# Altium PCB EC-Remoter.PcbDoc
Units mil, origin at the board's own origin, x right, y up, seen from the top; angles counter-clockwise.
Board outline 1574.8 x 1181.1 mil, 2 copper layers (Top Layer, Bottom Layer); 57 components, 44 nets, 248 pads, 38 vias.
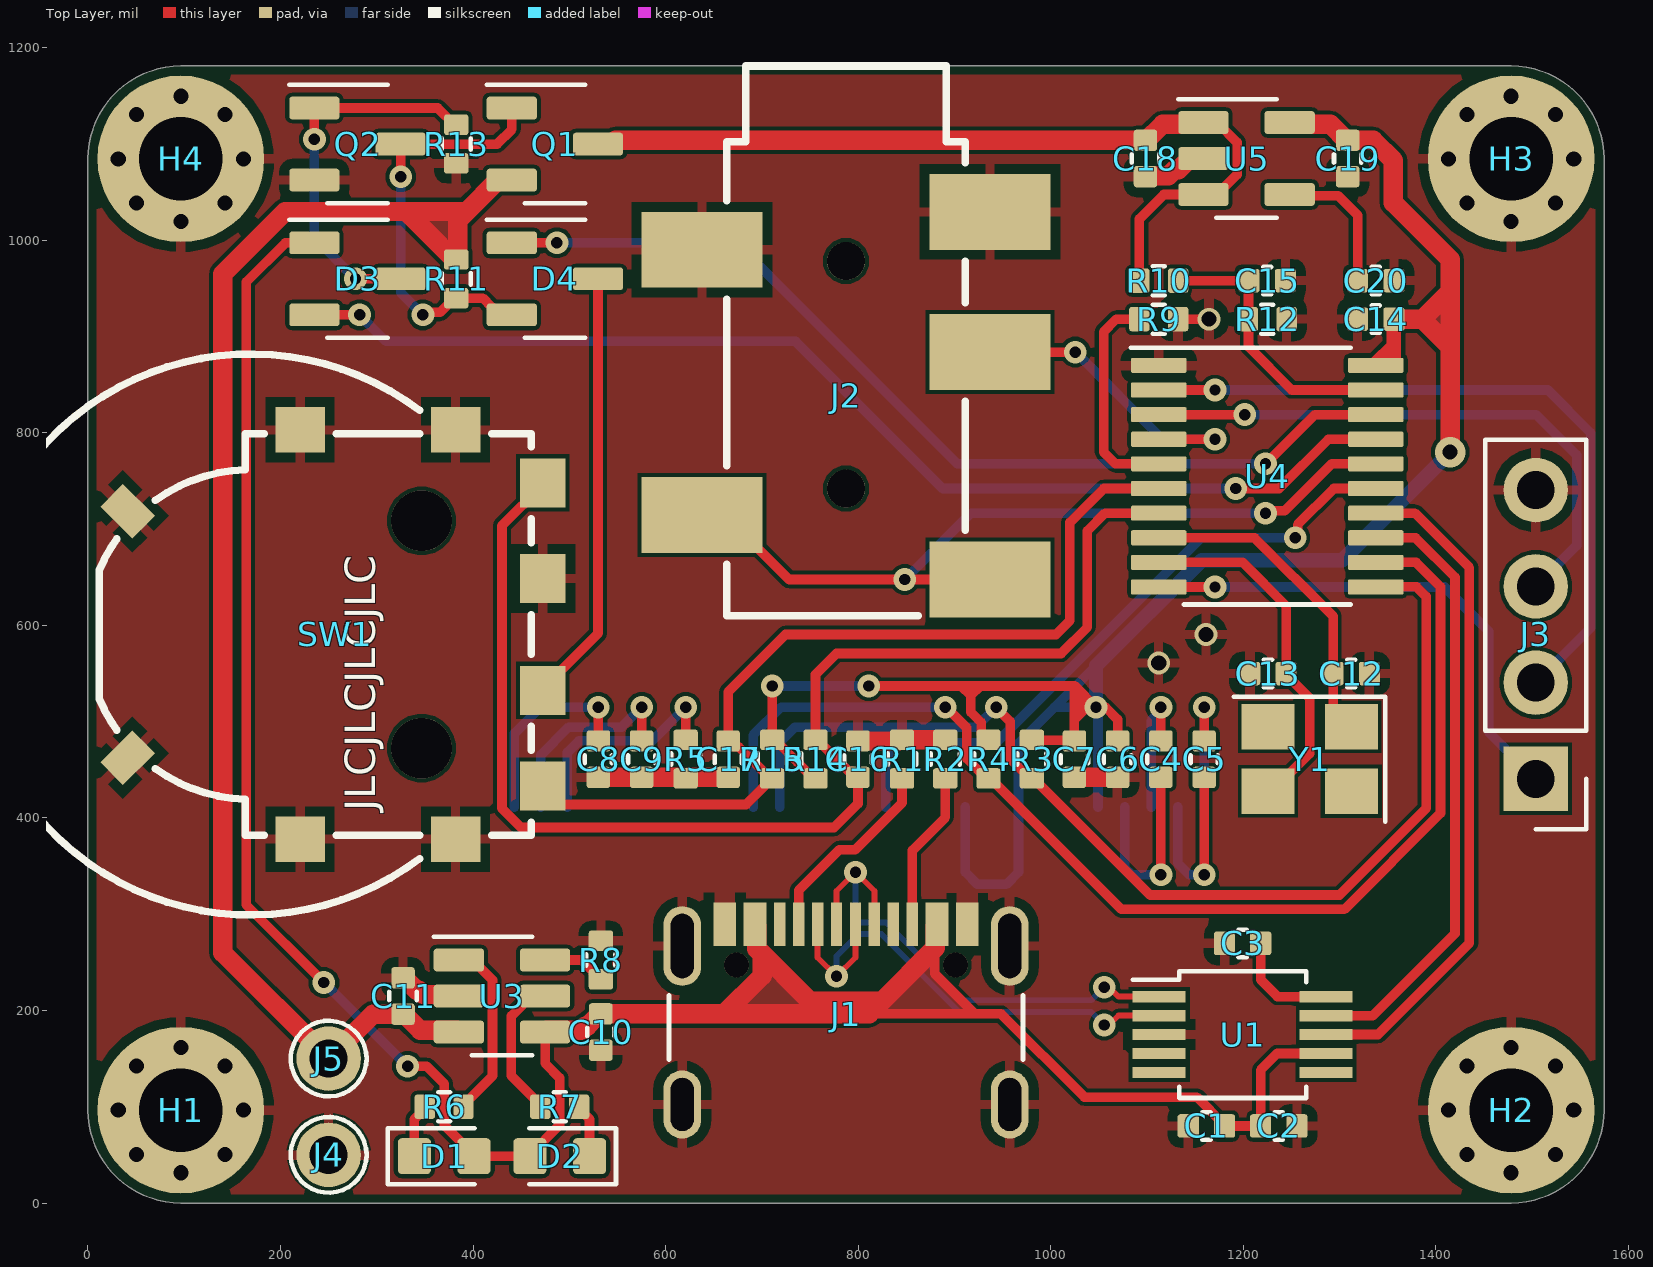
[diagram p0: Top Layer view]
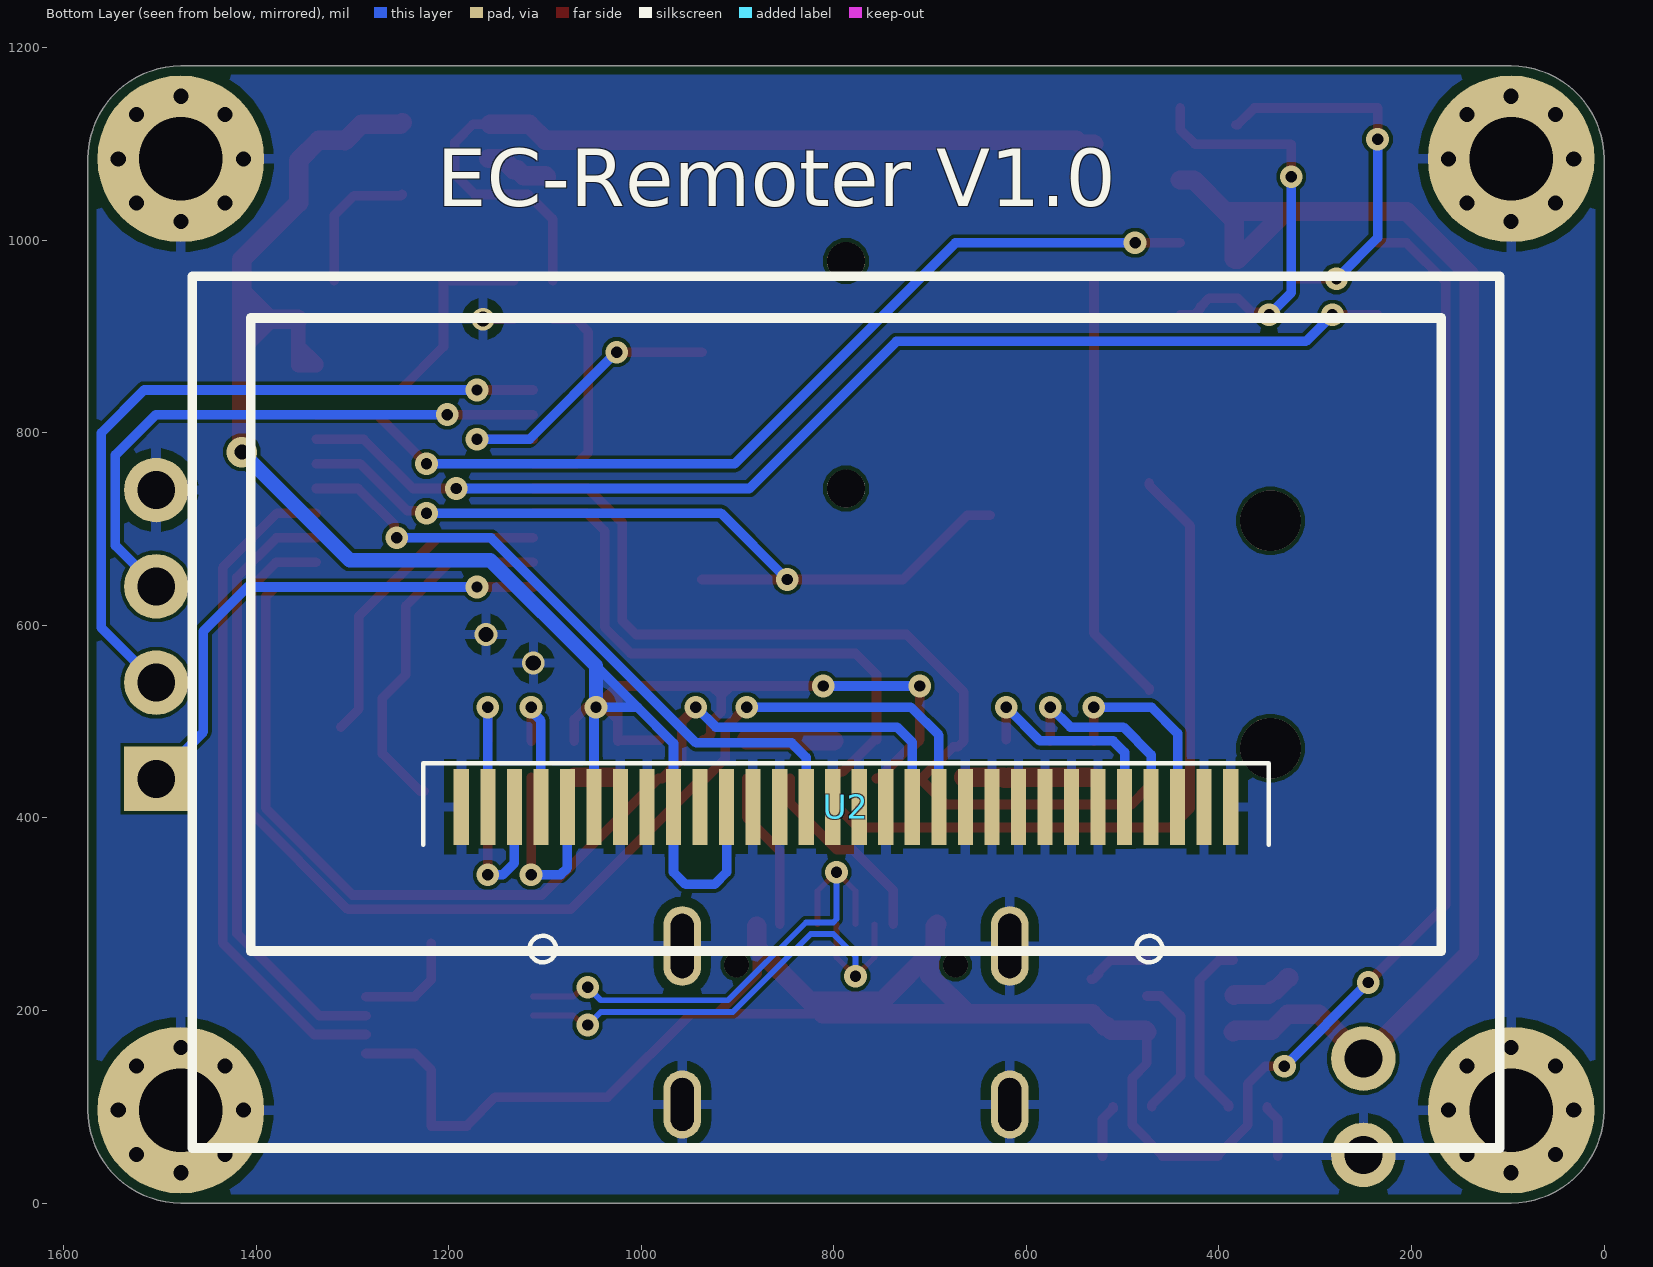
[diagram p1: Bottom Layer view, seen from below]
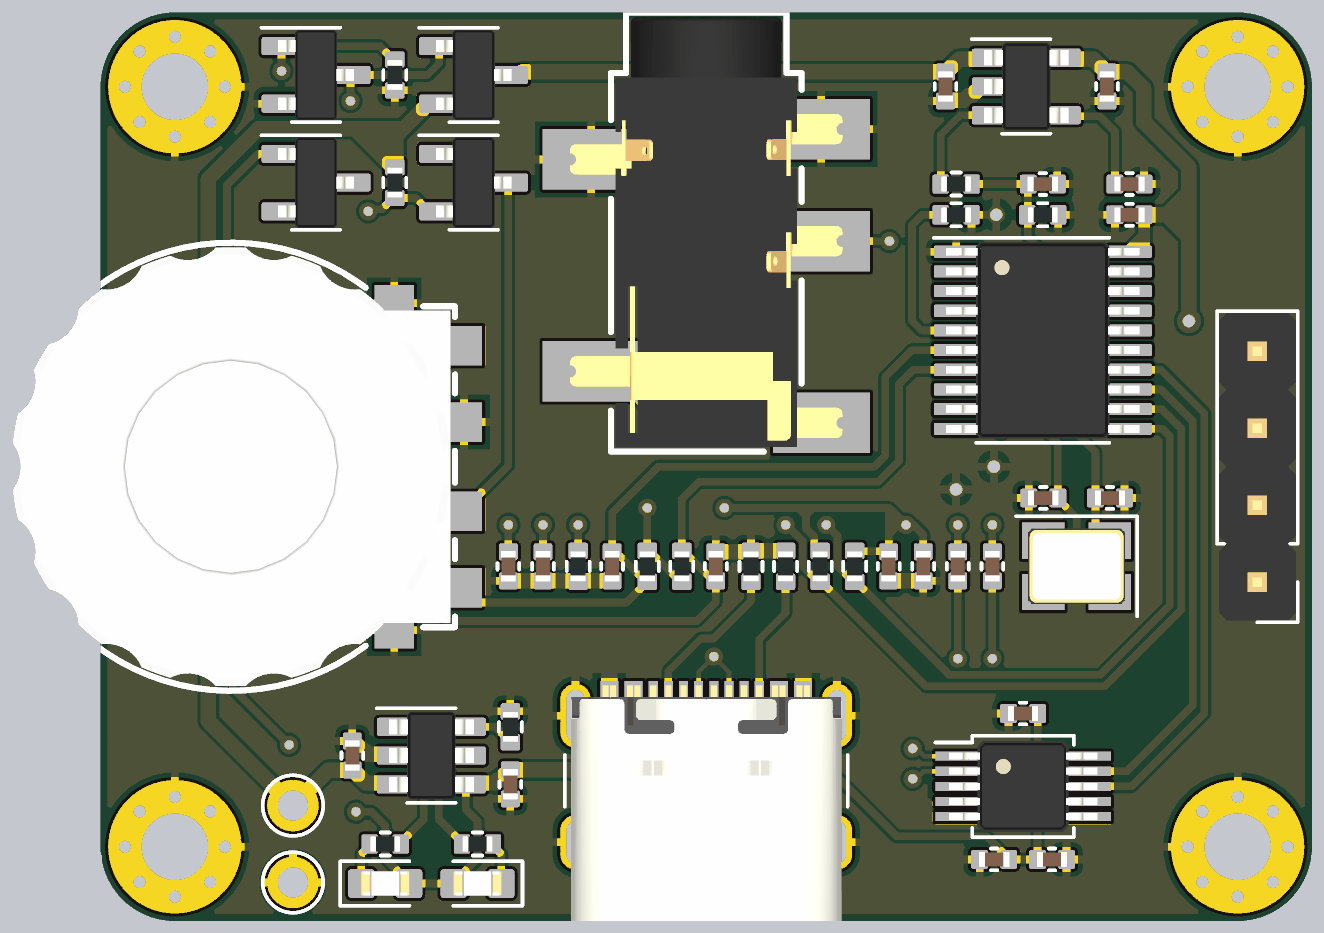
[diagram p2: 3D render of the assembled board from above, using the file's embedded part models]

## Layer stack, top to bottom
Top Solder: solder mask 0.4, Solder Resist, Dk 3.5
Top Layer: signal copper 1.4
Dielectric 1: dielectric 12.6, FR-4, Dk 4.8
Bottom Layer: signal copper 1.4
Bottom Solder: solder mask 0.4, Solder Resist, Dk 3.5

## Board outline
0,96.46 ccw(c96.46,96.46) 96.46,0 1478.35,0 ccw(c1478.35,96.46) 1574.8,96.46 1574.8,1084.65 ccw(c1478.35,1084.65) 1478.35,1181.1 96.46,1181.1 ccw(c96.46,1084.65) 0,1084.65

## Design rules (kind name [scope] priority, off if disabled: settings)
Clearance [All] p1: gap=3.94 ignorepadtopadclearanceinfootprint=FALSE
ComponentClearance [All] p1: gap=10 collisioncheckmode=3 verticalgap=10 showdistances=FALSE donotcheckwithout3dbody=TRUE
DiffPairsRouting [All] p1: maxlimit=10 minlimit=6 mostfreqgap=6 toplayer_minwidth=6 toplayer_maxwidth=15 toplayer_prefwidth=6 bottomlayer_minwidth=6 bottomlayer_maxwidth=15 bottomlayer_prefwidth=6 maxuncoupledlength=500
PolygonConnect [All] p1: connectstyle=Relief reliefconductorwidth=10 reliefentries=4 polygonreliefangle="90 Angle" airgapwidth=10
RoutingVias [All] p1: holewidth=28 width=50 viastyle="Through Hole" minholewidth=28 minwidth=50 maxholewidth=28 maxwidth=50
SilkToSilkClearance [All] p1: silktosilkclearance=5.91
SilkToSolderMaskClearance [IsPad] p1: minsilkscreentomaskgap=5.91 clearancetoexposedcopper=TRUE
SolderMaskExpansion [All] p1: expansion=4 istentingtop=FALSE
Width [All] p1: maxlimit=30 minlimit=4 preferedwidth=10 minimp=50.000000 maximp=50.000000 favimp=50.000000
26 further rules are at their usual default settings.

## Classes and differential pairs
differential pair USB: +USB_P -USB_N

## Components (designator, comment, footprint, x,y, rotation, side; value= is the part's Value field where it differs from the comment)
C1 "10uF" C_0402_1005Metric 1161.77,80 r180 top locked
C2 "100nF" C_0402_1005Metric 1236.97,80 r0 top locked
C3 "100nF" C_0402_1005Metric 1199.37,269.68 r180 top locked
C4 "1uF-10V" C_0402_1005Metric 1114.5,461.06 r90 top locked
C5 "1uF-10V" C_0402_1005Metric 1159.45,461.06 r90 top locked
C6 "1uF" C_0402_1005Metric 1069.55,461.06 r90 top locked
C7 "1uF" C_0402_1005Metric 1024.6,461.06 r90 top locked
C8 "2.2uF" C_0402_1005Metric 530.16,461.06 r90 top locked
C9 "2.2uF" C_0402_1005Metric 575.11,461.06 r90 top locked
C10 "10uF" C_0402_1005Metric 532.76,177.6 r270 top locked
C11 "10uF" C_0402_1005Metric 327.24,215 r90 top locked
C12 "12pF" C_0402_1005Metric 1312.28,550 r180 top locked
C13 "12pF" C_0402_1005Metric 1225.67,550 r0 top locked
C14 "0.1uF" C_0402_1005Metric 1337.72,918.11 r0 top locked
C15 "5pF" C_0402_1005Metric 1225,958.11 r0 top locked
C16 "0.1uF" C_0402_1005Metric 799.85,461.06 r90 top locked
C17 "0.1uF" C_0402_1005Metric 665.01,461.06 r270 top locked
C18 "1uF" C_0402_1005Metric 1098.5,1085 r270 top locked
C19 "1uF" C_0402_1005Metric 1308.5,1085 r270 top locked
C20 "22nF" C_0402_1005Metric 1337.72,958.11 r0 top locked
D1 "G" LED_0603_1608Metric 370,48.62 r0 top locked
D2 "R" LED_0603_1608Metric 490,48.62 r180 top locked
D3 "BAT54C" SOT-23-3 280,960 r0 top locked
D4 "BAT54C" SOT-23-3 485,960 r0 top locked
H1 "MountingHole_Pad" MountingHole_2.2mm_M2_Pad_Via 96.46,96.46 r0 top locked
H2 "MountingHole_Pad" MountingHole_2.2mm_M2_Pad_Via 1478.35,96.46 r0 top locked
H3 "MountingHole_Pad" MountingHole_2.2mm_M2_Pad_Via 1478.35,1084.65 r0 top locked
H4 "MountingHole_Pad" MountingHole_2.2mm_M2_Pad_Via 96.46,1084.65 r0 top locked
J1 "USB_C_Receptacle_USB2.0_16P" USB_C_Receptacle_GCT_USB4105-xx-A_16P_TopMnt_Horizontal 787.4,144.68 r0 top locked
J2 "PJ-327A" Jack_3.5mm_PJ327A_Horizontal 787.4,856.3 r0 top locked
J3 "Conn_01x04_Pin" PinHeader_1x04_P2.54mm_Vertical 1503.94,440.55 r180 top locked
J4 "Conn_01x01_Pin" TestPoint_Plated_Hole_D1.0mm 250,50 r0 top locked
J5 "Conn_01x01_Pin" TestPoint_Plated_Hole_D1.0mm 250,150 r0 top locked
Q1 "AO3401A" SOT-23-3 485,1100 r0 top locked
Q2 "AO3400A" SOT-23-3 280,1100 r0 top locked
R1 "5K1" R_0402_1005Metric 845.59,461.06 r270 top locked
R2 "5K1" R_0402_1005Metric 890.54,461.06 r270 top locked
R3 "4K7" R_0402_1005Metric 980.44,461.06 r270 top locked
R4 "4K7" R_0402_1005Metric 935.49,461.06 r270 top locked
R5 "560K-1%" R_0402_1005Metric 620.84,461.06 r90 top locked
R6 "1K" R_0402_1005Metric 370,100 r0 top locked
R7 "1K" R_0402_1005Metric 490,100 r180 top locked
R8 "2K-1%" R_0402_1005Metric 532.76,252.4 r90 top locked
R9 "10K" R_0402_1005Metric 1112.28,918.11 r180 top locked
R10 "1M" R_0402_1005Metric 1112.28,958.11 r0 top locked
R11 "100K" R_0402_1005Metric 382.5,960 r90 top locked
R12 "1M" R_0402_1005Metric 1225,918.11 r0 top locked
R13 "100K" R_0402_1005Metric 382.5,1100 r270 top locked
R14 "10K" R_0402_1005Metric 755.69,461.06 r270 top locked
R15 "10K" R_0402_1005Metric 710.74,461.06 r90 top locked
SW1 "SIQ-02FVS3" SIQ-02FVS3 169.29,590.55 r90 top locked
U1 "CH340X" MSOP-10_3x3mm_P0.5mm 1199.37,175 r0 top locked
U2 "OLED-128O064D-130I" OLED-128O064D 787.4,411.42 r180 bottom locked
U3 "TP4057" SOT-23-6 430,215 r0 top locked
U4 "Air001" TSSOP-20_4.4x6.5mm_P0.65mm 1225,755 r0 top locked
U5 "RT9193-33GB" SOT-23-5 1203.5,1085 r0 top locked
Y1 "24MHz" Crystal_SMD_3225-4Pin_3.2x2.5mm 1268.98,461.06 r180 top locked

## Footprints (in the part's own frame and the unit in brackets; to place one, negate y for a bottom-side part, rotate by r counter-clockwise, add the part's x,y. Pads: shape width x height; smd on the part's side, far side on the other; paste and mask are expansions set on the pad)
C_0402_1005Metric [mm]
  rrect25% 0.56x0.62 smd: 1(-0.48,0) 2(0.48,0)
  silkscreen extent -0.11,-0.36 0.11,0.36, body extent -0.5,-0.25 0.5,0.25, height 0.5
Crystal_SMD_3225-4Pin_3.2x2.5mm [mm]
  rect 1.4x1.2 smd: 1(-1.1,-0.85) 2(1.1,-0.85) 3(1.1,0.85) 4(-1.1,0.85)
  silkscreen extent -2,-1.65 2,1.65, body extent -1.6,-1.25 1.6,1.25, height 0.64
Jack_3.5mm_PJ327A_Horizontal [mm]
  rect 3.2x2 smd: 2(-3.8,-3.6) 3(-3.8,3.4) 4(3.8,4.4) 5(3.8,0.7) 6(3.8,-5.3)
  round 1 hole 1 unplated: ""(0,-2.9) ""(0,3.1)
  silkscreen extent -3.15,-6.25 3.15,8.25, body extent -4.5,-6.1 4.5,8.1, height 4.9
LED_0603_1608Metric [mm]
  rrect25% 0.875x0.95 smd: 1(-0.787,0) 2(0.787,0)
  silkscreen extent -1.49,-0.73 0.8,0.73, body extent -0.8,-0.4 0.8,0.4, height 1.1
MountingHole_2.2mm_M2_Pad_Via [mm]
  round 0.7 hole 0.4: 1(-1.65,0) 1(-1.167,-1.167) 1(-1.167,1.167) 1(0,-1.65) 1(0,1.65) 1(1.167,-1.167) 1(1.167,1.167) 1(1.65,0)
  round 4.4 hole 2.2: 1(0,0)
MSOP-10_3x3mm_P0.5mm [mm]
  rect 1.4x0.3 smd: 1(-2.2,1) 2(-2.2,0.5) 3(-2.2,0) 4(-2.2,-0.5) 5(-2.2,-1) 6(2.2,-1) 7(2.2,-0.5) 8(2.2,0) 9(2.2,0.5) 10(2.2,1)
  silkscreen extent -2.9,-1.68 1.68,1.68, body extent -2.45,-1.5 2.45,1.5, height 0.95
OLED-128O064D [mm]
  rect 0.4x2 smd: 1(-10.15,0) 2(-9.45,0) 3(-8.75,0) 4(-8.05,0) 5(-7.35,0) 6(-6.65,0) 7(-5.95,0) 8(-5.25,0) 9(-4.55,0) 10(-3.85,0) 11(-3.15,0) 12(-2.45,0) 13(-1.75,0) 14(-1.05,0) 15(-0.35,0) 16(0.35,0) 17(1.05,0) 18(1.75,0) 19(2.45,0) 20(3.15,0) 21(3.85,0) 22(4.55,0) 23(5.25,0) 24(5.95,0) 25(6.65,0) 26(7.35,0) 27(8.05,0) 28(8.75,0) 29(9.45,0) 30(10.15,0)
  silkscreen extent -11.15,-4.1 11.15,1.15
PinHeader_1x04_P2.54mm_Vertical [mm]
  rect 1.7x1.7 hole 1: 1(0,0)
  round 1.7 hole 1: 2(0,-2.54) 3(0,-5.08) 4(0,-7.62)
  silkscreen extent -1.33,-8.95 1.33,1.33, body extent -1.27,-8.89 1.27,1.27, height 8.54
R_0402_1005Metric [mm]
  rrect25% 0.54x0.64 smd: 1(-0.51,0) 2(0.51,0)
  silkscreen extent -0.15,-0.38 0.15,0.38, body extent -0.5,-0.25 0.5,0.25, height 0.35
SIQ-02FVS3 [mm]
  rect 1.3x1.2 smd: A(-4,-7.7) B(4,-7.7) C(1.475,-7.7) S(-1.475,-7.7)
  rect 1.2x1.3 smd: S1(-5.4,-5.4) S1(-5.4,-1.3) S1(5.4,-5.4) S1(5.4,-1.3)
  rect 0.85x1.2 smd rot 45: S1(-3.253,3.253)
  rect 0.85x1.2 smd rot 135: S1(3.253,3.253)
  round 1.6 hole 1.6 unplated: ""(-3,-4.5) ""(3,-4.5)
  silkscreen extent -7.4,-7.4 7.4,7.4, body extent -7.25,-7.26 7.25,7.21, height 4
SOT-23-3 [mm]
  rrect25% 1.325x0.6 smd: 1(-1.138,0.95) 2(-1.138,-0.95) 3(1.138,0)
  silkscreen extent -1.8,-1.56 0.8,1.56, body extent -1.25,-1.5 1.25,1.5, height 1.2
SOT-23-5 [mm]
  rrect25% 1.325x0.6 smd: 1(-1.138,0.95) 2(-1.138,0) 3(-1.138,-0.95) 4(1.138,-0.95) 5(1.138,0.95)
  silkscreen extent -1.8,-1.56 0.8,1.56, body extent -1.4,-1.45 1.4,1.45, height 1.55
SOT-23-6 [mm]
  rrect25% 1.325x0.6 smd: 1(-1.138,0.95) 2(-1.138,0) 3(-1.138,-0.95) 4(1.138,-0.95) 5(1.138,0) 6(1.138,0.95)
  silkscreen extent -1.8,-1.56 0.8,1.56, body extent -1.4,-1.45 1.4,1.45, height 1.55
TestPoint_Plated_Hole_D1.0mm [mm]
  round 1.7 hole 1: 1(0,0)
  silkscreen extent -1,-1 1,1
TSSOP-20_4.4x6.5mm_P0.65mm [mm]
  rrect25% 1.475x0.4 smd: 1(-2.863,2.925) 2(-2.863,2.275) 3(-2.863,1.625) 4(-2.863,0.975) 5(-2.863,0.325) 6(-2.863,-0.325) 7(-2.863,-0.975) 8(-2.863,-1.625) 9(-2.863,-2.275) 10(-2.863,-2.925) 11(2.863,-2.925) 12(2.863,-2.275) 13(2.863,-1.625) 14(2.863,-0.975) 15(2.863,-0.325) 16(2.863,0.325) 17(2.863,0.975) 18(2.863,1.625) 19(2.863,2.275) 20(2.863,2.925)
  silkscreen extent -3.6,-3.38 2.2,3.38, body extent -3.2,-3.25 3.2,3.25, height 1.2
USB_C_Receptacle_GCT_USB4105-xx-A_16P_TopMnt_Horizontal [mm]
  rect 0.3x1.15 smd: A1(-3.35,3.68) A4(-2.55,3.68) A5(-1.25,3.68) A6(-0.25,3.68) A7(0.25,3.68) A8(1.25,3.68) A9(2.55,3.68) A12(3.35,3.68) B1(3.05,3.68) B4(2.25,3.68) B5(1.75,3.68) B6(0.75,3.68) B7(-0.75,3.68) B8(-1.75,3.68) B9(-2.25,3.68) B12(-3.05,3.68)
  oval 1x1.8 hole 0.6 slot 1.4 at 90 deg: S1(-4.32,-1.075) S1(4.32,-1.075)
  oval 1x2.1 hole 0.6 slot 1.7 at 90 deg: S1(-4.32,3.105) S1(4.32,3.105)
  round 0.65 hole 0.65 unplated: ""(-2.89,2.605) ""(2.89,2.605)
  silkscreen extent -4.67,0.1 4.67,1.8, body extent -4.47,-3.67 4.47,4.11, height 3.31

## Part data
C1 C2 C3 C4 C5 C6 C7 C8 C9 C10 C11 C12 C13 C14 C15 C16 C17 C18 C19 C20: library part C, "Capacitor"
D1 D2: library part LED, "Light emitting diode"
D3 D4: "dual schottky barrier diode, common cathode"
H1 H2 H3 H4: "Mounting Hole with connection"
J1: "USB 2.0-only 16P Type-C Receptacle connector"
J3: "Generic connector, single row, 01x04"
J4 J5: "Generic connector, single row, 01x01"
Q1: "Package_TO_SOT_SMD:SOT-23"
Q2: "30V Vds, 5.7A Id, N-Channel MOSFET, SOT-23"
R1 R2 R3 R4 R5 R6 R7 R8 R9 R10 R11 R12 R13 R14 R15: library part R, "Resistor"
U1: "USB serial converter, 5V-tolerant IO, UART, MSOP-10"
U2: "1.30' OLED display 128x64"
U3: "500mA Single-Cell Li-Ion Charger, SOT-23-6"
U4: "合宙 Arm Cortex-M0+ MCU, 32KB Flash, 4KB RAM, 48 MHz, 1.7-5.5V, 18 GPIO, TSSOP20"
U5: library part RT9193, "Positive 300mA Low Dropout Regulator"
Y1: library part Crystal, "Crystal"

## Free pads (board coordinates)
  rect 23.62x45.28 smd: 2(661.42,289.57) 2(913.39,289.57) 3(692.91,289.57) 3(881.89,289.57)

## Via types
v1: diameter 23.62, hole 11.81, Top Layer to Bottom Layer, tented both sides, 34 vias
v2: diameter 23.62, hole 15.75, Top Layer to Bottom Layer, tented both sides, 3 vias
v3: diameter 31.5, hole 15.75, Top Layer to Bottom Layer, tented both sides, 1 vias

## Nets (pads, with @x,y where several pads share a name; then routed paths per layer and width w, separated by ;. In a path a pad name is that pad's centre, name@x,y a point inside that pad or via, vN(x,y) a via of type N, cw(c..) or ccw(c..) an arc to the next point about the centre after c; other vN are vias at no path point)
+3V3: C6.2 C7.2 C14.2 C19.1 R3.1 R4.1 R14.2 R15.2 U2.6 U2.9 U2.11 U4.20 U5.5 | length 2445
  Top Layer w10: v1(710.75,537.01) R15.2 716.37,475.51 719.2,475.51 753.72,440.98 R14.2 ; v1(811,537) 907,537 ; R4.1 933.52,481.14 927.89,486.77 927.89,499.11 917,510 917,527 ; R3.1 981.02,480.55 1024.02,480.55 C7.2 1024.61,502.43 ; C6.2 1069.57,502.43 1057,515 v1(1047.09,515) ; 907,537 927,537 ; 907,537 917,527 ; 917,527 927,537 ; 927,537 1025.09,537 ; 1024.61,502.43 1030.89,508.72 ; 1024.61,502.43 1024.61,536.52 ; 1024.61,536.52 1030.89,530.24 1030.89,508.72 ; 1024.61,536.52 1025.09,537 ; 1025.09,537 v1(1047.09,515) ; 1030.89,508.72 1037.17,515 v1(1047.09,515)
  Top Layer w15: C14.2 1356.61,890.61 ; 1356.61,890.61 1356.61,870.53 1356.24,870.16 U4.20 1337.7,871.7 1356.61,890.61
  Top Layer w20: U5.5 1250.12,1120.59 1290.63,1120.59 C19.1@1307.91,1103.31 ; C19.1 1335.1,1103.9 1356,1083 1356,1039 1415,980 1415,947 ; C14.2 1386.11,918.11 ; v3(1415,780) 1415,889.22 ; 1386.11,918.11 1415,889.22 ; 1386.11,918.11 1415,947 ; 1415,889.22 1415,947
  Bottom Layer w10: v1(710.75,537.01) v1(811,537) ; U2.11 911.42,343.58 924,331 953.95,331 966.54,343.58 U2.9 966.54,477.54 1004,515 ; 1047.09,558.09 1004,515 ; U2.6 1049.21,512.87 v1(1047.09,515) 1004,515
  Bottom Layer w15: v1(1047.09,515) 1047.09,558.09 1156.78,667.78 1302.78,667.78 v3(1415,780)
E\C\_\A\: C17.1 R15.1 SW1.A U4.6 | length 965.1
  Top Layer w10: SW1.A 472.44,432.62 491.06,414 683.76,414 R15.1 708.77,440.98 675.82,473.94 671.03,473.94 C17.1 665.01,531.01 724.55,590.55 1005.55,590.55 1020,605 1020,707 1055.2,742.2 U4.6
E\C\_\B\: C16.1 R14.1 SW1.B U4.7 | length 1384.1
  Top Layer w10: SW1.B 472.44,746.06 430,703.62 430,410 450,390 775,390 799.85,414.85 C16.1 793.83,448.19 790.61,448.19 757.66,481.14 R14.1 755.69,549 777.56,570.87 1010.87,570.87 1038,598 1038,698 1056.61,716.61 U4.7
E\C\_\S\: D4.1 U4.18 | length 1013.8
  Top Layer w10: D4.1 v1(487.13,997.4) ; v1(1223.19,767.8) 1274.37,818.98 U4.18
  Bottom Layer w10: v1(487.13,997.4) 673.6,997.4 903.2,767.8 v1(1223.19,767.8)
F\O\C\U\S\: J2.5 U4.4 | length 329.5
  Top Layer w10: J2.5 v1(1025.59,883.86) ; U4.4 v1(1170.67,793.39)
  Bottom Layer w10: v1(1025.59,883.86) 1116.06,793.39 v1(1170.67,793.39)
GND: C1.2 C2.2 C3.2 C6.1 C7.1 C8.1 C9.1 C10.2 C11.2 C12.1 C13.1 C14.1 C15.2 C16.2 C17.2 C18.2 C19.2 C20.2 H1.1 H2.1 H3.1 H4.1 J1.A1 J1.A12 J1.B1 J1.B12 J1.S1 J2.3 J2.4 J3.4 J4.1 pad.2 Q2.2 R1.1 R2.1 R5.1 R8.2 R9.1 R12.2 R13.2 SW1.C SW1.S1 U1.3 U2.1 U2.7 U2.8 U2.12 U2.13 U2.15 U2.16 U2.17 U2.20 U2.21 U2.22 U2.23 U2.24 U2.25 U2.29 U2.30 U3.2 U4.1 U5.2 | length 439
  Top Layer w10: 821.15,479.96 822.83,478.27 ; 868.06,481.14 868.11,481.1 ; R9.1 v2(1164.37,918.11)
  Top Layer w20: C11.2 328.43,233.9 329.45,232.87 329.45,232.78 341.16,221.06 343.61,221.06 348.15,216.52 383.69,216.52 U3.2@384.31,215.9 ; C8.1 C9.1 617.69,442.17 618.87,440.98 R5.1 622.81,440.98 623.99,442.17 C17.2 ; C16.2 821.15,479.96 842.44,479.96 843.62,481.14 R1.1 868.06,481.14 R2.1 ; C7.1 C6.1 ; C18.2 1099.53,1067.13 1122.37,1067.13 1128.59,1073.35 1132.8,1073.35 1144.45,1085 U5.2
  other v2: 1112.2,561.02 1161.42,590.55
M\C\U\_\N\R\S\T\: J3.1 U4.10 | length 535.4
  Top Layer w10: U4.10 v1(1170.67,639.84)
  Bottom Layer w10: v1(1170.67,639.84) 1409.16,639.84 1455,594 1455,489.49 J3.1
MCU_RXD: U1.8 U4.14 | length 699.1
  Top Layer w10: U1.8 1340,175 1435,270 1435,660 1378.39,716.61 U4.14
MCU_SWC: J3.3 U4.3 | length 605.4
  Top Layer w10: U4.3 v1(1201.5,818.98)
  Bottom Layer w10: v1(1201.5,818.98) 1504.31,818.98 1546.34,776.95 1546.34,682.95 J3.3
MCU_SWD: J3.2 U4.2 | length 750.1
  Top Layer w10: U4.2 v1(1170.67,844.57)
  Bottom Layer w10: v1(1170.67,844.57) 1516.43,844.57 1560.87,800.13 1560.87,597.48 J3.2
MCU_TXD: U1.9 U4.13 | length 638.6
  Top Layer w10: U1.9 1334.69,194.68 1420,280 1420,650 1378.98,691.02 U4.13
NetC3_1: C3.1 U1.10 | length 112.9
  Top Layer w10: C3.1 1218.27,231.73 1235.63,214.37 U1.10
NetC4_1: C4.1 U2.5 | length 205
  Top Layer w10: v1(1114.5,341.06) C4.1
  Bottom Layer w10: U2.5 1076.77,348.23 1083.94,341.06 v1(1114.5,341.06)
NetC4_2: C4.2 U2.4 | length 142.8
  Top Layer w10: C4.2 v1(1114.5,515)
  Bottom Layer w10: U2.4 1104.33,501.15 1114.5,511.31 v1(1114.5,515)
NetC5_1: C5.1 U2.3 | length 192
  Top Layer w10: v1(1159.45,341.06) C5.1
  Bottom Layer w10: U2.3 1131.89,353.11 1143.94,341.06 v1(1159.45,341.06)
NetC5_2: C5.2 U2.2 | length 138.6
  Top Layer w10: C5.2 v1(1159.45,515)
  Bottom Layer w10: U2.2 v1(1159.45,515)
NetC8_2: C8.2 U2.28 | length 210
  Top Layer w10: C8.2 v1(530.16,515)
  Bottom Layer w10: U2.28 442.91,487.91 470,515 v1(530.16,515)
NetC9_2: C9.2 U2.27 | length 214.2
  Top Layer w10: C9.2 v1(575.11,515)
  Bottom Layer w10: U2.27 470.47,465.47 499.25,494.25 554.36,494.25 v1(575.11,515)
NetC12_2: C12.2 U4.8 Y1.1 | length 337.9
  Top Layer w10: U4.8 1211.98,691.02 1293.39,609.61 C12.2 1293.39,513.15 1312.01,494.53 Y1.1
NetC13_2: C13.2 U4.9 Y1.3 | length 374.1
  Top Layer w10: U4.9 1199.57,665.43 1244.57,620.43 C13.2 1244.57,548.82 1269,524.39 1269,466.99 1229.61,427.6 Y1.3
NetC20_1: C20.1 U5.4 | length 147.5
  Top Layer w10: U5.4 1249.76,1046.14 1298.86,1046.14 1318.82,1026.18 C20.1
NetD1_1: D1.1 R6.1 | length 55.9
  Top Layer w10: D1.1 339,87.11 349.92,98.03 R6.1
NetD2_1: D2.1 R7.1 | length 55.9
  Top Layer w10: R7.1 510.08,98.03 521,87.11 D2.1
NetD3_3: D3.3 Q2.1 R13.1 | length 396.5
  Top Layer w10: v1(235.2,1105) Q2.1 ; Q2.1 363.21,1137.4 380.53,1120.08 R13.1 ; v1(277.87,960) D3.3
  Bottom Layer w10: v1(235.2,1105) 235.2,1002.68 v1(277.87,960)
NetD4_3: D4.3 SW1.S | length 451.3
  Top Layer w10: SW1.S 472.44,534.45 529.78,591.79 D4.3
NetJ1_A5: J1.A5 R1.2 | length 205.6
  Top Layer w10: J1.A5 738.19,324.8 780.51,367.13 797.13,367.13 845.59,415.59 R1.2
NetJ1_B5: J1.B5 R2.2 | length 165.6
  Top Layer w10: J1.B5 856.3,366.3 890.54,400.54 R2.2
NetR5_2: R5.2 U2.26 | length 232.7
  Top Layer w10: R5.2 v1(620.84,515)
  Bottom Layer w10: U2.26 498.03,468.03 510,480 585.84,480 v1(620.84,515)
NetR6_2: R6.2 U3.1 | length 187.8
  Top Layer w10: U3.1 399.49,252.4 420.24,231.65 420.24,132.13 390.08,101.97 R6.2
NetR7_2: R7.2 U3.5 | length 150.3
  Top Layer w10: R7.2 469.92,101.97 439.78,132.11 439.78,194.25 460.53,215 U3.5
NetR8_1: R8.1 U3.6 | length 67.4
  Top Layer w10: U3.6 512.68,252.4 525.16,239.92 525.16,237.95 530.79,232.32 R8.1
NetR9_2: R9.2 U4.5 | length 230
  Top Layer w10: R9.2 1068.11,918.11 1055,905 1055,780 1067.2,767.8 U4.5
O\L\E\D\_\R\E\S\E\T\: U2.14 U4.15 | length 682.5
  Top Layer w10: v1(1254,691.02) 1256.61,693.63 1256.61,704.61 1294.2,742.2 U4.15
  Bottom Layer w10: U2.14 828.74,462.74 844,478 943,478 1156.02,691.02 v1(1254,691.02)
OLED_SCL: R3.2 U2.18 U4.11 | length 1171
  Top Layer w10: v1(943.35,515) 957.95,500.39 957.95,461.5 978.47,440.98 R3.2 982.41,440.98 1103.39,320 1300,320 1390,410 1390,630 1380,640 1337.85,640 U4.11
  Bottom Layer w10: U2.18 718.5,478.5 734.25,494.25 922.6,494.25 v1(943.35,515)
OLED_SDA: R4.2 U2.19 U4.12 | length 1259.2
  Top Layer w10: v1@891.72,514.68 913.01,493.4 913.01,461.49 933.52,440.98 R4.2 937.46,440.98 1073.44,305 1305,305 1405,405 1405,640 1379.57,665.43 U4.12
  Bottom Layer w10: U2.19 690.94,485.94 720,515 v1(890.55,515)
PWR_EN: D3.2 U4.17 | length 1198.4
  Top Layer w10: D3.2 v1(282.13,922.6) ; v1(1192.36,742.2) 1237.2,742.2 1288.39,793.39 U4.17
  Bottom Layer w10: v1(282.13,922.6) 309.72,895 735,895 887.8,742.2 v1(1192.36,742.2)
PWR_KEY: D4.2 Q1.1 Q2.3 R11.1 | length 438.4
  Top Layer w10: Q2.3 425,1100 440.22,1115.22 Q1.1 ; v1(324.8,1066.06) Q2.3 ; v1(347.87,922.6) 350.48,925.2 365.81,925.2 380.53,939.92 R11.1 410.1,939.92 419.13,930.89 419.13,929.41 425.94,922.6 D4.2
  Bottom Layer w10: v1(324.8,1066.06) 324.8,945.67 v1(347.87,922.6)
PWR_VOL: C15.1 R10.2 R12.1 U4.19 | length 293.4
  Top Layer w10: R10.2 C15.1 1205.51,957.52 1205.51,889.49 1250.43,844.57 U4.19
S\H\U\T\T\E\R\: J2.2 J2.6 U4.16 | length 866
  Top Layer w10: J2.2 661.42,714.57 728.35,647.64 v1(848.43,647.64) J2.6 ; v1(1223.19,716.61) 1225.8,719.22 1243.22,719.22 1291.8,767.8 U4.16
  Bottom Layer w10: v1(848.43,647.64) 917.4,716.61 v1(1223.19,716.61)
USB_N: J1.A7 J1.B7 U1.2 | length 533.5
  Top Layer w6: J1.B7 757.87,255.12 v1(777.56,235.43) 797.24,255.12 J1.A7 ; v1(1055.79,184.84) 1060.56,184.84 1070.4,194.69 U1.2
  Bottom Layer w6: v1(777.56,235.43) 777.56,256.29 800.76,279.49 824.06,279.49 905.02,198.53 1042.1,198.53 v1(1055.79,184.84)
USB_P: J1.A6 J1.B6 U1.1 | length 533.5
  Top Layer w6: J1.A6 777.56,324.02 v1(797.24,343.7) 816.93,324.02 J1.B6 ; v1(1055.79,224.21) 1060.56,224.21 1070.4,214.37 U1.1
  Bottom Layer w6: v1(797.24,343.7) 797.24,295 800.76,291.49 829.03,291.49 909.99,210.53 1042.1,210.53 v1(1055.79,224.21)
V_BAT: C11.1 J5.1 Q1.2 R11.2 U3.3 | length 1490.7
  Top Layer w20: U3.3 383.41,179.41 345.12,179.41 328.43,196.1 C11.1 296.1,196.1 J5.1 140,260 140,965 205,1030 330.61,1030 ; Q1.2 425.94,1062.6 393.35,1030 ; 330.61,1030 393.35,1030 ; 330.61,1030 380.53,980.08 R11.2 383.43,980.08 384.05,980.71 384.05,1020.71 393.35,1030
V_PWR: C18.1 Q1.3 R10.1 U5.1 U5.3 | length 898.4
  Top Layer w10: R10.1 1092.2,1022.2 1117.6,1047.6 U5.3 1172.99,1047.6 1193.74,1068.35 1193.74,1101.65 1174.8,1120.59 U5.1@1156.91,1120.59
  Top Layer w20: Q1.3 544.06,1100 547.95,1103.9 C18.1 1099.69,1103.9 1116.38,1120.59 U5.1@1156.91,1120.59
V_USB: C1.1 C2.1 C10.1 D1.2 D2.2 D3.1 J1.A4 J1.A9 J1.B4 J1.B9 pad.3 U1.7 U3.4 | length 2743.4
  Top Layer w10: D3.1 205.08,997.4 164.37,956.69 164.37,309.63 v1(245,229) ; v1(332,142) 352,142 370,124 370,81.08 400.98,50.1 D1.2 D2.2 459.02,50.1 490,81.08 490,130 474.8,145.2 U3.4 ; 811.48,196.5 921.2,196.5 ; 880.08,265.09 880.08,263.95 879.45,263.32 ; pad.3@881.89,289.57 880.08,287.76 879.45,287.13 879.45,264.46 879.45,263.32 ; U1.7 1235.31,155.31 1218.07,138.07 C2.1 C1.1 1180.67,81.18 1151.85,110 1035,110 948.5,196.5 921.2,196.5 ; 879.45,263.32 879.45,238.24 921.2,196.5
  Top Layer w20: U3.4 476.61,179.41 512.14,179.41 516.39,183.66 518.74,183.66 531.57,196.5 C10.1 660.68,196.5 ; pad.3@692.91,289.57 694.72,287.76 694.72,265.09 ; J1.B4@880.08,287.76 880.08,265.09 879.45,264.46 824.67,209.69 ; 660.68,196.5 700.35,236.17 700.35,258.32 694.72,263.95 694.72,265.09 ; 660.68,196.5 811.48,196.5 824.67,209.69 ; 694.72,265.09 750.13,209.69 824.67,209.69
  Bottom Layer w10: v1(245,229) v1(332,142)
pads on no net: J1. J1.A8 J1.B8 J2. SW1. U1.4 U1.5 U1.6 U2.10 Y1.2 Y1.4

## Polygon pours and split planes (outlines as drawn)
GND on Top Layer "GND_L01_P014" (solid, remove dead copper, pour order 14): 0,0 1574.8,0 1574.8,1181.1 0,1181.1
+3V3 on Top Layer "+3V3_L01_P008" (solid, pour order 8): 1415,947 1386.11,918.11 1415,889.22
V_USB on Top Layer "V_USB_L01_P007" (solid, pour order 7): 811.48,196.5 921.2,196.5 879.45,238.24 879.45,263.32 878.3,263.32
V_BAT on Top Layer "V_BAT_L01_P003" (solid, pour order 3): 330.61,1030 393.35,1030 384.05,1020.71 384.05,980.71 381.16,980.71 380.53,980.08
V_USB on Top Layer "V_USB_L01_P000" (solid, pour order 0): 700.35,258.32 700.35,236.17 660.68,196.5 811.48,196.5 824.67,209.69 748.99,209.69
GND on Bottom Layer "GND_L02_P016" (solid, remove dead copper, pour order 16): 0,0 1574.8,0 1574.8,1181.1 0,1181.1
+3V3 on Bottom Layer "+3V3_L02_P010" (solid, pour order 10): 1047.09,558.09 1004,515 1047.09,515

## Silkscreen, mask and mechanical layers (free items; w line width, h text height)
Top Overlay:
  text "JLCJLCJLCJLC" at 298.23,406.88 h31.5 r90
Bottom Overlay:
  lines w10: 108.27,57.09 1466.54,57.09 1466.54,962.6 108.27,962.6 108.27,57.09 ; 168.9,261.81 1405.91,261.81 1405.91,919.29 168.9,919.29 168.9,261.81
  text "EC-Remoter V1.0" at 1212.26,1035.59 h60
Mechanical 1:
  the board outline again, w10